# Altium PCB pcb_proc.PcbDoc
Units mm, origin at the board's own origin, x right, y up, seen from the top; angles counter-clockwise.
Board outline 100.33 x 94.04 mm, 2 copper layers (Top Layer, Bottom Layer), stack 1.671 mm thick; 67 components, 51 nets, 264 pads, 89 vias.
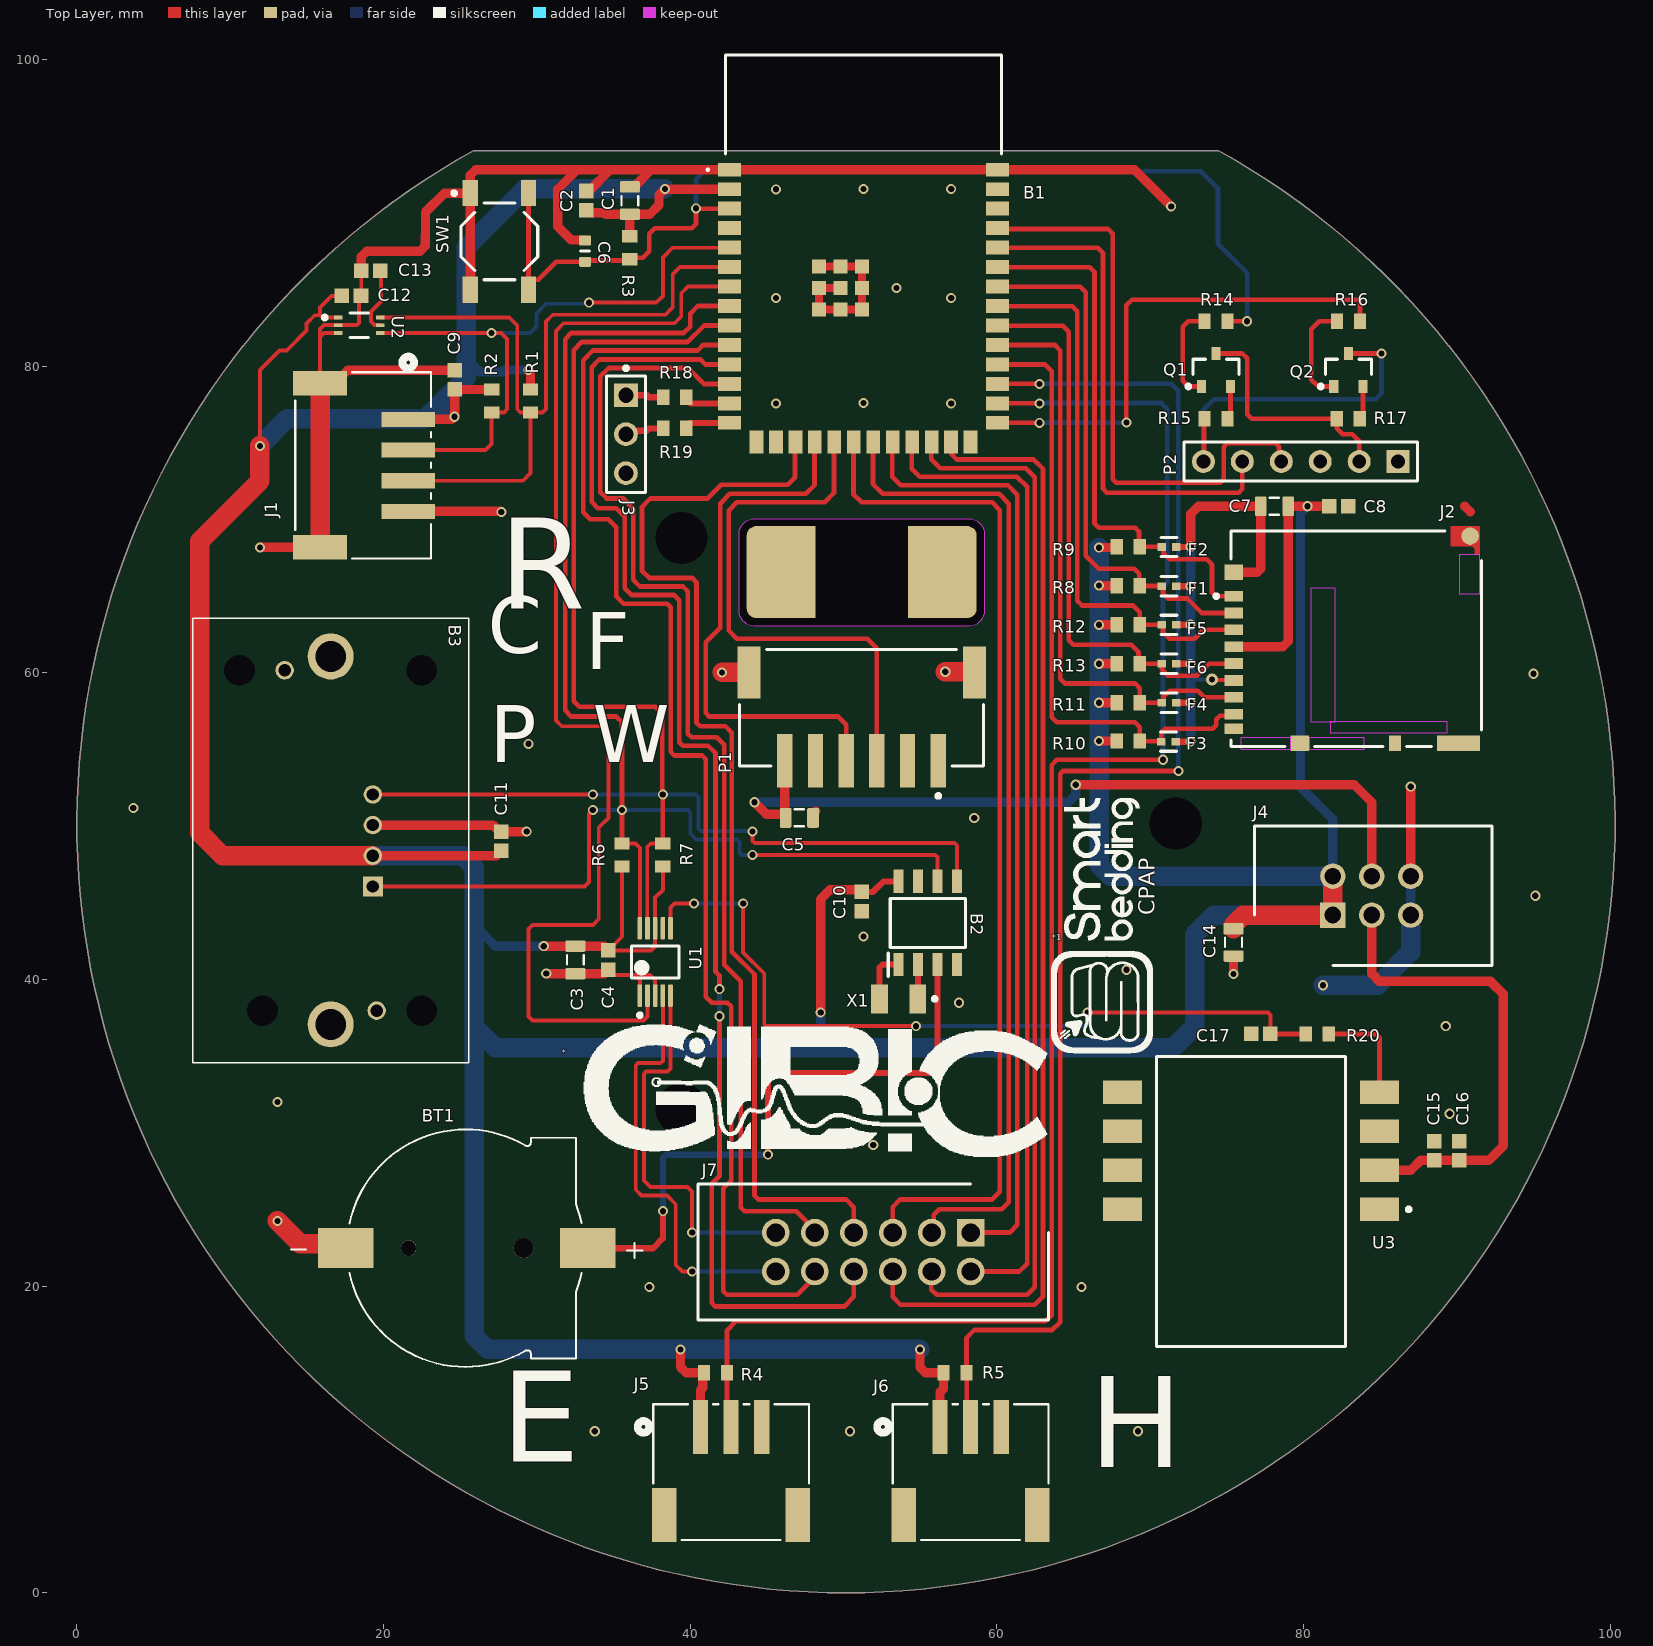
[diagram p0: Top Layer view]
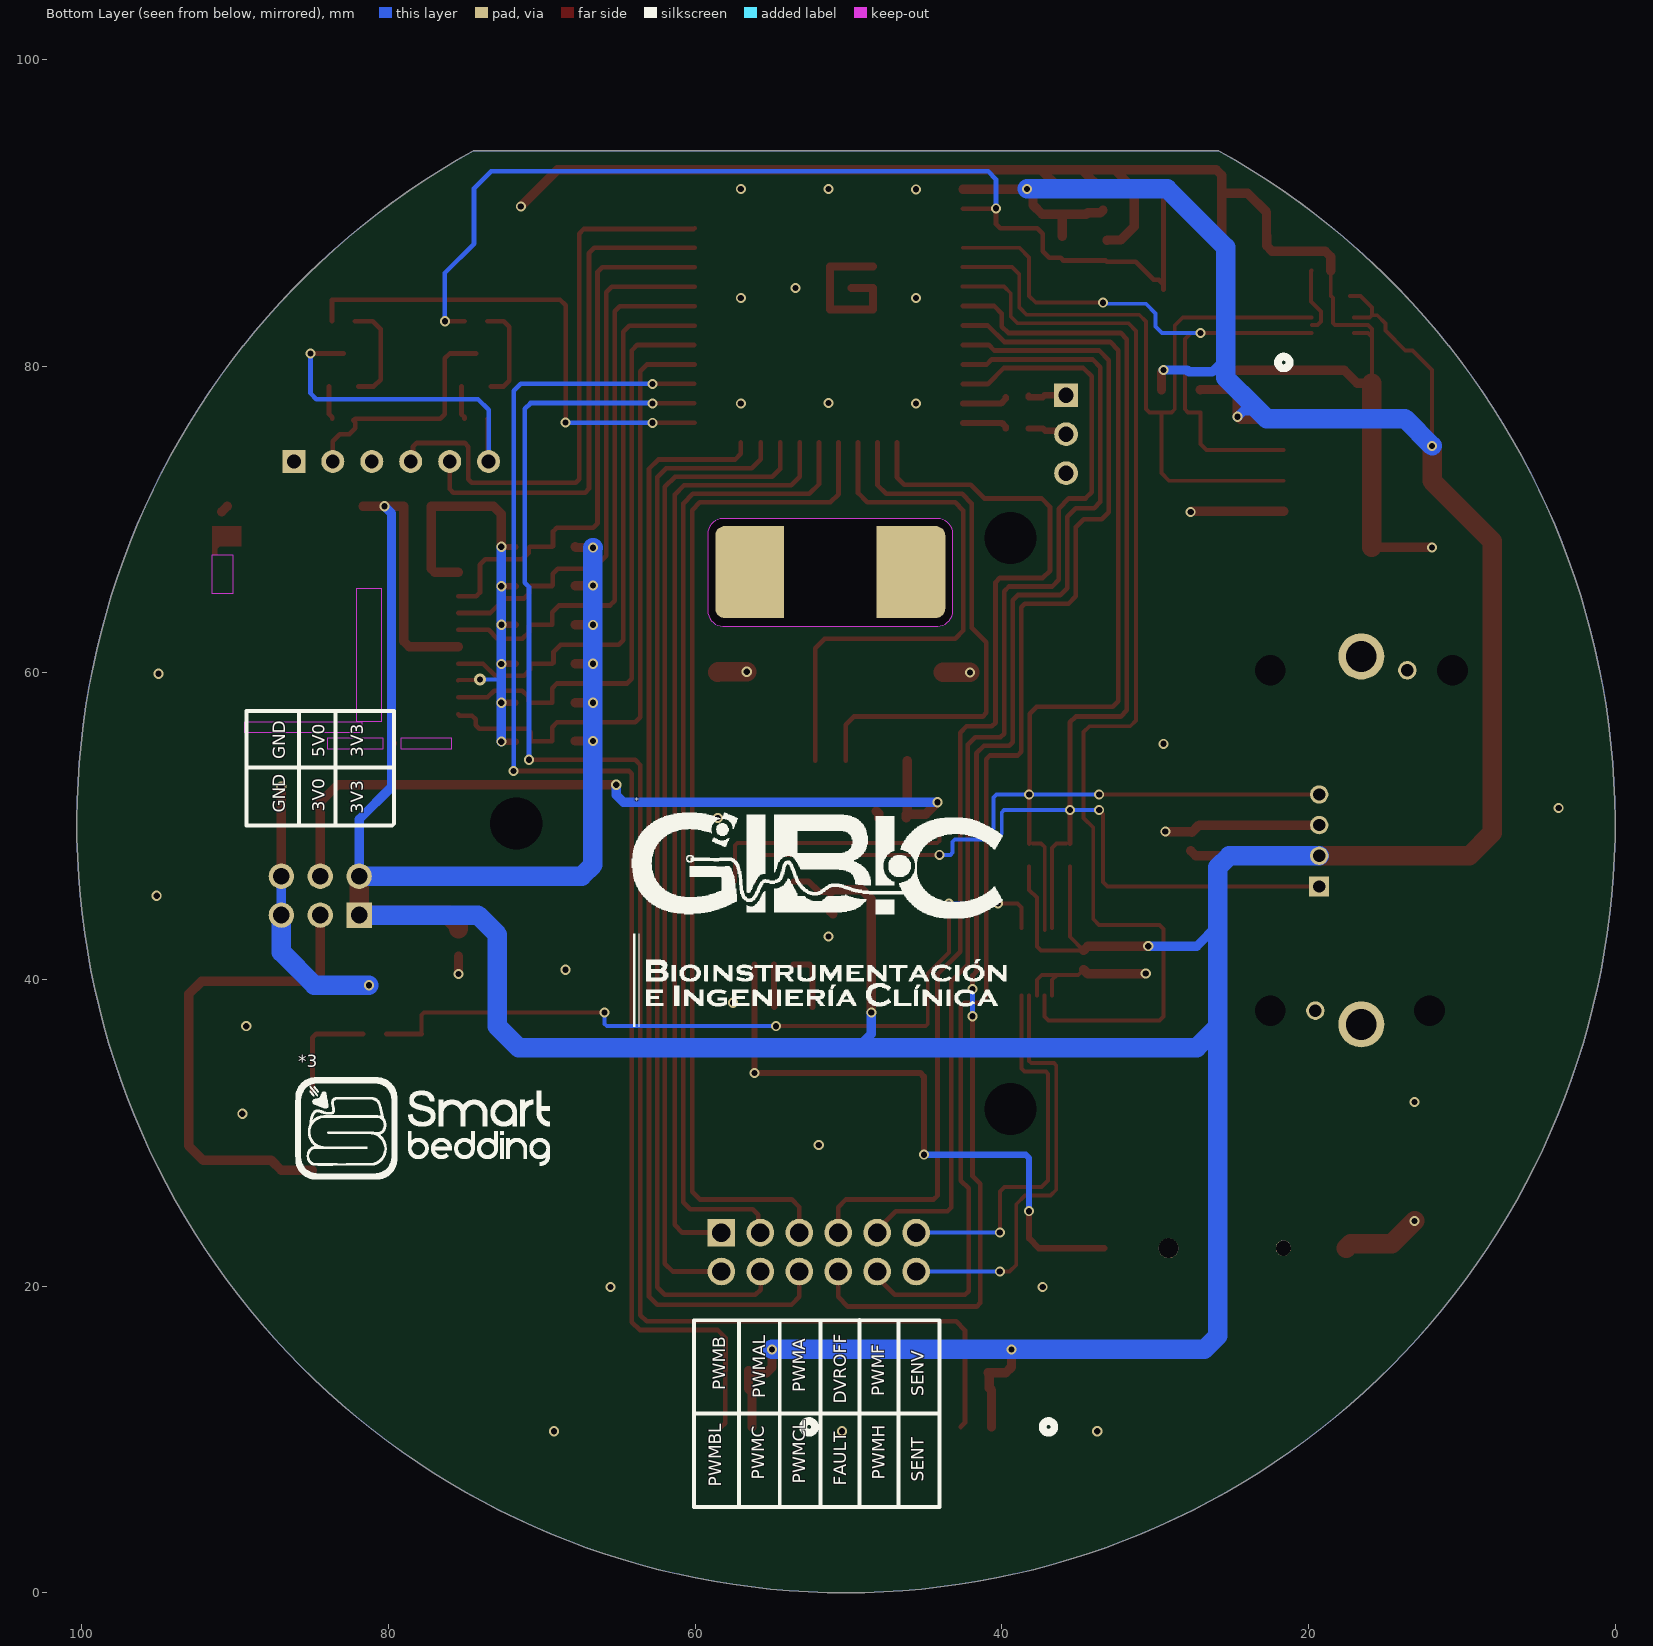
[diagram p1: Bottom Layer view, seen from below]

## Layer stack, top to bottom
Top Solder: solder mask 0.0102, Solder Resist, Dk 3.5
Top Layer: signal copper 0.0356
Dielectric 1: dielectric 1.6, FR-4, Dk 4.8
Bottom Layer: signal copper 0.0356
Bottom Solder: solder mask 0.0102, Solder Resist, Dk 3.5

## Board outline
25.845,94.04 ccw(c50.165,50.165) 74.485,94.04
cut-out: 43.191,64.052 43.191,69.052 cw(c44.191,69.052) 44.191,70.052 58.191,70.052 cw(c58.191,69.052) 59.191,69.052 59.191,64.052 cw(c58.191,64.052) 58.191,63.052 44.191,63.052 cw(c44.191,64.052)

## Design rules (kind name [scope] priority, off if disabled: settings)
BoardOutlineClearance [All] p1: gap=0.508 ignorepadtopadclearanceinfootprint=FALSE
Clearance Clearance_1 [All] p1: gap=0.152 ignorepadtopadclearanceinfootprint=FALSE except(0: Arc-Hole Track-Hole SMDPad-Hole THPad-Hole Via-Hole Fill-Hole Poly-Hole Region-Hole Text-Hole; 0.508: Arc-Poly Track-Poly SMDPad-Poly THPad-Poly Via-Poly Fill-Poly Poly-Poly Poly-Region Poly-Text)
Clearance [InNet('GND')] p2: gap=0.152 ignorepadtopadclearanceinfootprint=FALSE except(0: Arc-Hole Track-Hole SMDPad-Hole THPad-Hole Via-Hole Fill-Hole Poly-Hole Region-Hole Text-Hole; 0.508: Arc-Poly Arc-Region Track-Poly Track-Region SMDPad-Poly SMDPad-Region THPad-Poly THPad-Region Via-Poly Via-Region Fill-Poly Fill-Region Poly-Poly Poly-Region Poly-Text Region-Region)
MinimumSolderMaskSliver [All] p1: minsoldermaskwidth=0.102
PolygonConnect [All] p1: connectstyle=Relief reliefconductorwidth=0.508 reliefentries=4 polygonreliefangle="90 Angle" airgapwidth=0.254
RoutingVias [All] p1: holewidth=0.711 width=1.422 viastyle="Through Hole" minholewidth=0.254 minwidth=0.508 maxholewidth=0.406 maxwidth=0.762
SilkToSilkClearance [All] p1: silktosilkclearance=0.102
SilkToSolderMaskClearance [IsPad] p1: minsilkscreentomaskgap=0.152 clearancetoexposedcopper=TRUE
SolderMaskExpansion [All] p1: expansion=0.102 istentingtop=FALSE
Width [All] p1: maxlimit=2.54 minlimit=0.254 preferedwidth=0.406
27 further rules are at their usual default settings.

## Classes and differential pairs
net class PWR: 3V 3V3 5V GND
component class Sen_PF: C12 C13 C14 C15 C16 C17 J4 J5 J6 J7 P4 R20 U2 U3
component class Processor: B1 B2 B3 BT1 C1 C2 C3 C4 C5 C6 C7 C8 C9 C10 C11 F1 F2 F3 F4 F5 F6 J1 J2 J3 P1 P2 Q1 Q2 R1 R2 R3 R4 R5 R6 R7 R8 R9 R10 R11 R12 R13 R14 R15 R16 R17 R18 R19 SW1 U1 X1

## Components (designator, comment, footprint, x,y, rotation, side; value= is the part's Value field where it differs from the comment)
* "GIBIC_Silk" GIBIC_SILK 48.133,32.893 r0 top
* "GIBIC_ALLSilk" GIBIC_ALL_SILK 52.181,44.958 r180 bottom
*1 "SB2_Silk" SMARTBEDDING2_SILK 66.929,43.561 r90 top
*3 "SB2_Silk" SMARTBEDDING2_SILK 77.724,30.226 r180 bottom
B1 "ESP32-S3-WROOM-1-N8R8" ESP32S3WROOM1N8R8 51.308,87.557 r0 top
B2 "DS1338Z-33+" SOIC127P600X175-8N 55.499,43.688 r90 top
B3 "SDP810-125Pa" SDP810125PA 19.304,46.07 r90 top locked
BT1 "1056" BAT_1056 25.146,22.479 r180 top
C1 "Capacitor 22µF +/-40% 16V 0805" CAPC0805(2012)145_L 36.068,90.805 r90 top
C2 "Capacitor 100 nF +/-10% 50 V 0603" CAPC1608X90X40NL10T20 33.234,90.805 r90 top
C3 "Capacitor 22µF +/-40% 16V 0805" CAPC0805(2012)145_L 32.512,41.275 r270 top
C4 "Capacitor 100 nF +/-10% 50 V 0603" CAPC1608X90X40NL10T20 34.671,41.275 r270 top
C5 "Capacitor 22µF +/-40% 16V 0805" CAPC0805(2012)145_L 47.117,50.546 r180 top
C6 "Capacitor 1µF +/-40% 50V 0603" CAPC0603(1608)100_L 33.147,87.503 r270 top
C7 "Capacitor 22µF +/-40% 16V 0805" CAPC0805(2012)145_L 78.106,70.866 r180 top
C8 "Capacitor 100 nF +/-10% 50 V 0603" CAPC1608X90X40NL10T20 82.296,70.866 r0 top
C9 "Capacitor 100 nF +/-10% 50 V 0603" CAPC1608X90X40NL10T20 24.638,79.111 r90 top
C10 "Capacitor 100 nF +/-10% 50 V 0603" CAPC1608X90X40NL10T20 51.181,45.085 r270 top
C11 "Capacitor 100 nF +/-10% 50 V 0603" CAPC1608X90X40NL10T20 27.686,49.022 r90 top
C12 "Capacitor 100 nF +/-10% 50 V 0603" CAPC1608X90X40NL10T20 17.907,84.582 r0 top
C13 "Capacitor 100 nF +/-10% 50 V 0603" CAPC1608X90X40NL10T20 19.177,86.233 r180 top
C14 "Capacitor 22µF +/-40% 16V 0805" CAPC0805(2012)145_L 75.438,42.418 r270 top
C15 "Capacitor 100 nF +/-10% 50 V 0603" CAPC1608X90X40NL10T20 88.519,28.829 r90 top
C16 "Capacitor 100 nF +/-10% 50 V 0603" CAPC1608X90X40NL10T20 90.17,28.829 r90 top
C17 "Capacitor 100 nF +/-10% 50 V 0603" CAPC1608X90X40NL10T20 77.216,36.449 r180 top
F1 "LESD8D3.3CAT5G" FP-ESDALC5-1BM2-MFG 71.227,65.649 r180 top
F2 "LESD8D3.3CAT5G" FP-ESDALC5-1BM2-MFG 71.227,68.212 r180 top
F3 "LESD8D3.3CAT5G" FP-ESDALC5-1BM2-MFG 71.207,55.512 r180 top
F4 "LESD8D3.3CAT5G" FP-ESDALC5-1BM2-MFG 71.227,58.052 r180 top
F5 "LESD8D3.3CAT5G" FP-ESDALC5-1BM2-MFG 71.227,63.132 r180 top
F6 "LESD8D3.3CAT5G" FP-ESDALC5-1BM2-MFG 71.227,60.592 r180 top
J1 "S4B-PH-SM4-TBLFSN" CONN_S4B-PH-SM4-TBLFSN_JST 18.669,73.533 r90 top
J2 "DM3AT-SF-PEJM5" FP-DM3AT-SF-PEJM5-MFG 83.439,62.23 r90 top locked
J3 "90120-0123" FP-90120-0123-MFG 35.814,75.565 r270 top
J4 "61200621621" SHDR6W64P254_2X3_1528X910X910P 81.915,44.196 r0 top
J5 "S3B-PH-SM4-TBLFSN" CONN_S3B-PH-SM4-TBLFSN_JST 42.672,7.874 r180 top
J6 "S3B-PH-SM4-TBLFSN" CONN_S3B-PH-SM4-TBLFSN_JST 58.293,7.874 r180 top
J7 "70246-1201" SHDR12W99P254_2X6_2286X889X927P 58.293,23.495 r180 top
P1 "S6B-PH-SM4-TB(LF)(SN)" JST-S6B-PH-SM4-TB(LF)(SN)_V 51.181,57.15 r180 top
P2 "Header 6" HDR1X6 86.174,73.787 r180 top
Q1 "QNPN" SOT-23B_L 74.295,79.756 r90 top
Q2 "QNPN" SOT-23B_L 82.931,79.756 r90 top
R1 "Resistor 10k +/-1% 0603 100 mW" RESC1608X55X25ML10T15 29.591,77.724 r270 top
R2 "Resistor 10k +/-1% 0603 100 mW" RESC1608X55X25ML10T15 27.051,77.724 r270 top
R3 "Resistor 10k +/-1% 0603 100 mW" RESC1608X55X25ML10T15 36.068,87.727 r270 top
R4 "Resistor 10k +/-1% 0603 100 mW" RESC1608X55X25ML10T15 41.656,14.351 r0 top
R5 "Resistor 10k +/-1% 0603 100 mW" RESC1608X55X25ML10T15 57.277,14.351 r0 top
R6 "Resistor 10k +/-1% 0603 100 mW" RESC1608X55X25ML10T15 35.56,48.117 r90 top
R7 "Resistor 10k +/-1% 0603 100 mW" RESC1608X55X25ML10T15 38.219,48.117 r90 top
R8 "Resistor 10k +/-1% 0603 100 mW" RESC1608X55X25ML10T15 68.568,65.69 r0 top
R9 "Resistor 10k +/-1% 0603 100 mW" RESC1608X55X25ML10T15 68.568,68.221 r0 top
R10 "Resistor 10k +/-1% 0603 100 mW" RESC1608X55X25ML10T15 68.568,55.558 r0 top
R11 "Resistor 10k +/-1% 0603 100 mW" RESC1608X55X25ML10T15 68.568,58.052 r0 top
R12 "Resistor 10k +/-1% 0603 100 mW" RESC1608X55X25ML10T15 68.568,63.132 r0 top
R13 "Resistor 10k +/-1% 0603 100 mW" RESC1608X55X25ML10T15 68.568,60.592 r0 top
R14 "Resistor 10k +/-1% 0603 100 mW" RESC1608X55X25ML10T15 74.295,82.931 r0 top
R15 "Resistor 10k +/-1% 0603 100 mW" RESC1608X55X25ML10T15 74.295,76.581 r0 top
R16 "Resistor 10k +/-1% 0603 100 mW" RESC1608X55X25ML10T15 82.943,82.931 r0 top
R17 "Resistor 10k +/-1% 0603 100 mW" RESC1608X55X25ML10T15 82.931,76.581 r0 top
R18 "Resistor 10k +/-1% 0603 100 mW" RESC1608X55X25ML10T15 38.989,77.978 r0 top
R19 "Resistor 10k +/-1% 0603 100 mW" RESC1608X55X25ML10T15 38.989,75.946 r0 top
R20 "Resistor 10k +/-1% 0603 100 mW" RESC1608X55X25ML10T15 80.899,36.449 r180 top
SW1 "TL3342F160QG" ESWI-TL3342F160QG_V 27.559,88.138 r0 top
U1 "ADS1015IDGST" FP-DGS0010A-MFG 37.719,41.148 r90 top
U2 "BH1750FVI-TR" ROHM_BH1750FVI-TR_0 18.415,82.677 r0 top
U3 "MP3V5004DP" Freescale_Semiconductor_SOT1693-1_MFG 76.581,28.829 r180 top locked
X1 "ABS07-32.768KHz-T" ABRA-ABS07-2_V 53.594,38.735 r180 top

## Footprints (in the part's own frame and the unit in brackets; to place one, negate y for a bottom-side part, rotate by r counter-clockwise, add the part's x,y. Pads: shape width x height; smd on the part's side, far side on the other; paste and mask are expansions set on the pad)
ABRA-ABS07-2_V [mm] "SMD, 2-Leads, Body 3.2x1.5mm"
  rect 1.1x1.9 smd: 1(-1.25,0) 2(1.25,0)
  silkscreen extent -2.48,-0.12 -2.23,0.12, body extent -1.6,-0.75 1.6,0.75, height 0.9
BAT_1056 [mm]
  rect 3.6x2.6 smd: N(7.61,0) P(-8.18,0)
  round 1.3 hole 1.3 unplated: ""(-3.98,0)
  round 1 hole 1 unplated: ""(3.51,0)
  silkscreen extent -11.74,-7.75 11.18,7.75, body extent -9.58,-7.5 9.22,7.63, height 4.17
CAPC0603(1608)100_L [mm] "Chip Capacitor, Body 1.6x0.8mm, Height 1.0mm, IPC High Density"
  rrect25% 0.66x0.76 smd: 1(-0.7,0) 2(0.7,0)
  silkscreen extent 0,-0.3 0,0.3, body extent -0.8,-0.4 0.8,0.4, height 0.95
CAPC0805(2012)145_L [mm] "Chip Capacitor, Body 2.0x1.2mm, Height 1.45mm, IPC High Density"
  rrect25% 0.76x1.3 smd: 1(-0.9,0) 2(0.89,0)
  silkscreen extent -0.3,-0.55 0.3,0.55, body extent -1,-0.6 1,0.6, height 1.45
CAPC1608X90X40NL10T20 [mm] "Chip Capacitor, 2-Leads, Body 1.70x0.90mm, IPC Medium Density"
  rect 0.95x0.95 smd: 1(-0.625,0) 2(0.625,0)
  body extent -0.85,-0.45 0.85,0.45, height 0.9
CONN_S3B-PH-SM4-TBLFSN_JST [mil]
  rect 39x138 smd paste+0 mask+0: 1(78.74,-115.93) 2(0,-115.93) 3(-78.74,-115.93)
  rect 63x138 smd paste+0 mask+0: 4(-171.26,110.44) 5(171.26,110.44)
  silkscreen extent -200,-175 240,175, body extent -195,-169 195,170, height 217
CONN_S4B-PH-SM4-TBLFSN_JST [mil]
  rect 39x138 smd paste+0 mask+0: 1(118.11,-115.93) 2(39.37,-115.93) 3(-39.37,-115.93) 4(-118.11,-115.93)
  rect 63x138 smd paste+0 mask+0: 5(-210.63,110.44) 6(210.63,110.44)
  silkscreen extent -239,-175 279,174, body extent -234,-144 234,205, height 215
ESP32S3WROOM1N8R8 [mm]
  rect 1.5x0.9 smd: 1(-8.75,5.26) 2(-8.75,3.99) 3(-8.75,2.72) 4(-8.75,1.45) 5(-8.75,0.18) 6(-8.75,-1.09) 7(-8.75,-2.36) 8(-8.75,-3.63) 9(-8.75,-4.9) 10(-8.75,-6.17) 11(-8.75,-7.44) 12(-8.75,-8.71) 13(-8.75,-9.98) 14(-8.75,-11.25) 27(8.75,-11.25) 28(8.75,-9.98) 29(8.75,-8.71) 30(8.75,-7.44) 31(8.75,-6.17) 32(8.75,-4.9) 33(8.75,-3.63) 34(8.75,-2.36) 35(8.75,-1.09) 36(8.75,0.18) 37(8.75,1.45) 38(8.75,2.72) 39(8.75,3.99) 40(8.75,5.26)
  rect 0.9x1.5 smd: 15(-6.985,-12.5) 16(-5.715,-12.5) 17(-4.445,-12.5) 18(-3.175,-12.5) 19(-1.905,-12.5) 20(-0.635,-12.5) 21(0.635,-12.5) 22(1.905,-12.5) 23(3.175,-12.5) 24(4.445,-12.5) 25(5.715,-12.5) 26(6.985,-12.5)
  rect 0.9x0.9 smd: 41(-1.5,-2.46) 42(-1.5,-1.06) 43(-2.9,-1.06) 44(-2.9,-2.46) 45(-2.9,-3.86) 46(-1.5,-3.86) 47(-0.1,-3.86) 48(-0.1,-2.46) 49(-0.1,-1.06)
  silkscreen extent -10.2,5.21 9,12.75, body extent -9,-12.75 9,12.75, height 3.1
ESWI-TL3342F160QG_V [mm] "SMD, 4-Leads, Body 5x5mm, Pitch 6.3mm"
  rect 1x1.7 smd: 1(-1.9,3.15) 2(-1.9,-3.15) 3(1.9,3.15) 4(1.9,-3.15)
  silkscreen extent -3.07,-2.5 2.5,3.27, body extent -2.5,-2.5 2.5,2.5, height 1.5
FP-90120-0123-MFG [mm]
  rect 1.55x1.55 hole 1 paste-2539.97 mask+0: 1(-2.54,0)
  round 1.55 hole 1 paste-2539.97 mask+0: 2(0,0) 3(2.54,0)
  silkscreen extent -4.42,-1.27 3.81,1.27, body extent -3.91,-1.37 3.91,1.37, height 0.25
FP-DGS0010A-MFG [mm]
  rrect33% 1.45x0.3 smd paste+0 mask+0: 1(-2.2,1) 2(-2.2,0.5) 3(-2.2,0) 4(-2.2,-0.5) 5(-2.2,-1) 6(2.2,-1) 7(2.2,-0.5) 8(2.2,0) 9(2.2,0.5) 10(2.2,1)
  silkscreen extent -3.6,-1.55 1.05,1.55, body extent -3.03,-1.8 3.03,1.8, height 0.25
FP-DM3AT-SF-PEJM5-MFG [mm]
  rect 0.7x1.2 smd paste+0 mask+0: 1(2.775,7.975) 2(1.675,7.975) 3(0.575,7.975) 4(-0.525,7.975) 5(-1.625,7.975) 6(-2.725,7.975) 7(-3.825,7.975) 8(-4.925,7.975) 9(-5.875,7.975)
  rect 1x0.8 smd paste+0 mask+0: 10(-6.825,-2.525)
  rect 1x1.2 smd paste+0 mask+0: 11(4.325,7.975) 12(-6.825,3.675)
  rect 1x2.8 smd paste+0 mask+0: 13(-6.825,-6.675)
  round 1.145 smd paste+0 mask+0: 14(6.689,-7.439)
  Top Layer region: 6.025,-6.175 7.325,-6.175 7.325,-8.075 5.475,-8.075 5.475,-7.725 5.875,-7.725 6.025,-7.575
  Keep-Out Layer region: 2.925,-8.075 5.475,-8.075 5.475,-6.725 2.925,-6.725
  Keep-Out Layer region: -7.225,-0.525 -6.475,-0.525 -6.475,3.075 -7.225,3.075
  Keep-Out Layer region: -7.225,4.275 -6.475,4.275 -6.475,7.525 -7.225,7.525
  Keep-Out Layer region: -6.125,-5.925 -5.425,-5.925 -5.425,1.675 -6.125,1.675
  Keep-Out Layer region: -5.425,1.375 3.275,1.375 3.275,2.975 -5.425,2.975
  silkscreen extent -7.02,-8.18 7.02,9.25, body extent -7.42,-8.27 7.42,8.67, height 0.25
FP-ESDALC5-1BM2-MFG [mm]
  rect 0.55x0.5 smd paste+0 mask+0: 1(-0.475,0) 2(0.475,0)
  silkscreen extent -0.53,-0.63 0.53,0.63, body extent -0.85,-0.43 0.85,0.43, height 0.25
Freescale_Semiconductor_SOT1693-1_MFG [mil]
  rect 100x60 smd paste+0 mask+0: 1(-330,150) 2(-330,50) 3(-330,-50) 4(-330,-150) 5(330,-150) 6(330,-50) 7(330,50) 8(330,150)
  silkscreen extent -410,-243 243,503, body extent -384,-252 384,506, height 10
GIBIC_ALL_SILK [mm]
  silkscreen extent -11.94,-8.05 12.48,5.89
GIBIC_SILK [mm]
  silkscreen extent -15.06,-4.42 15.16,4.17
HDR1X6 [mm] "Connector; Header; 6 Position"
  rect 1.5x1.5 hole 0.9: 1(0,0)
  round 1.5 hole 0.9: 2(2.54,0) 3(5.08,0) 4(7.62,0) 5(10.16,0) 6(12.7,0)
  silkscreen extent -1.27,-1.27 13.97,1.27
JST-S6B-PH-SM4-TB(LF)(SN)_V [mm] "SMD, 2-Leads, Body 15.9x7.6mm, Pitch 2mm"
  rect 1x3.5 smd: 1(-5,2.875) 2(-3,2.875) 3(-1,2.875) 4(1,2.875) 5(3,2.875) 6(5,2.875)
  rect 1.5x3.4 smd: MP1(-7.35,-2.875) MP2(7.35,-2.875)
  silkscreen extent -7.95,-4.37 7.95,5.3, body extent -7.95,-4.37 7.95,4.23, height 5.6
RESC1608X55X25ML10T15 [mm] "Chip Resistor, 2-Leads, Body 1.70x0.90mm, IPC Low Density"
  rect 0.8x1 smd: 1(-0.75,0) 2(0.75,0)
  body extent -0.85,-0.45 0.85,0.45, height 0.55
ROHM_BH1750FVI-TR_0 [mm]
  rect 0.55x0.25 smd paste+0 mask+0: 1(-1.375,0.5) 2(-1.375,0) 3(-1.375,-0.5) 4(1.375,-0.5) 5(1.375,0) 6(1.375,0.5)
  silkscreen extent -2.37,-0.8 0.6,0.8, body extent -1.75,-1 1.75,1, height 0.25
SDP810125PA [mm]
  rect 1.3x1.3 hole 0.8: 1(0,0)
  round 1.2 hole 0.8: 2(2,0) 3(4,0) 4(6,0) 5(14.1,5.75) 6(-8.1,-0.25)
  round 1 hole 2 unplated: MH1(-8.1,-3.2) MH2(14.1,-3.2) MH3(14.1,8.7) MH4(-8.1,7.2)
  round 3 hole 2: MS1(15,2.75) MS2(-9,2.75)
  silkscreen extent -11.5,-6.25 17.5,11.75, body extent -12.55,-7.3 18.55,12.8, height 23.79
SHDR6W64P254_2X3_1528X910X910P [mm]
  rect 1.65x1.65 / inner round 1.65 / far side rect 1.65x1.65 hole 1.1: 1(0,0)
  round 1.65 hole 1.1: 2(0,2.54) 3(2.54,0) 4(2.54,2.54) 5(5.08,0) 6(5.08,2.54)
  silkscreen extent -5.1,-3.28 10.38,5.82, body extent -5.1,-3.03 10.18,6.07, height 9.1
SHDR12W99P254_2X6_2286X889X927P [mm]
  rect 1.8x1.8 / inner round 1.8 / far side rect 1.8x1.8 hole 1.2: 1(0,0)
  round 1.8 hole 1.2: 2(0,2.54) 3(2.54,0) 4(2.54,2.54) 5(5.08,0) 6(5.08,2.54) 7(7.62,0) 8(7.62,2.54) 9(10.16,0) 10(10.16,2.54) 11(12.7,0) 12(12.7,2.54)
  silkscreen extent -5.08,-3.17 17.78,5.72, body extent -4.95,-2.92 17.91,5.97, height 9.28
SMARTBEDDING2_SILK [mm]
  silkscreen extent -8.35,-3.26 8.25,3.36
SOIC127P600X175-8N [mm]
  rect 1.525x0.65 smd: 1(-2.712,1.905) 2(-2.712,0.635) 3(-2.712,-0.635) 4(-2.712,-1.905) 5(2.712,-1.905) 6(2.712,-0.635) 7(2.712,0.635) 8(2.712,1.905)
  silkscreen extent -3.47,-2.45 1.6,2.58, body extent -3,-2.41 3,2.49, height 1.75
SOT-23B_L [mm] "SOT23, 3-Leads, Body 2.9x1.3mm, Pitch 0.95mm, Lead Span 2.4mm, IPC High Density"
  rect 0.85x0.6 smd: 1(-1.075,0.95) 2(-1.075,-0.95) 3(1.075,0)
  silkscreen extent -1.2,-1.5 0.7,1.92, body extent -0.7,-1.5 0.7,1.5, height 1.14

## Part data
B1: "WiFi Modules - 802.11 (Engineering Samples Only) SMD Module, ESP32-S3R8 with 8 MB Octal PSRAM Die, 8 MB Quad SPI flash, PCB Antenna"
B2: "Real Time Clock Serial 56Byte Maxim DS1338Z-33+ Real Time Clock  Battery Backup, Calendar, Clock, NV Timekeeping RAM, 56B RAM 8-Pin SOIC"
B3: "Sensirion SDP810-125PA, Differential Pressure Sensor +125Pa 4-Pin"
C1 C3 C5 C7 C14: library part CMP-001-00081-4, "Chip Capacitor, 22µF +/-40%, 16V, 0805, Thickness 1.45 mm"
C2 C4 C8 C9 C10 C11 C12 C13 C15 C16 C17: library part CMP-001-00017-6, "Chip Capacitor, 100 nF, +/- 10%, 50 V, 0603 (1608 Metric)"
C6: library part CMP-001-00078-4, "Chip Capacitor, 1µF +/-40%, 50V, 0603, Thickness 1 mm"
F1 F2 F3 F4 F5 F6: library part CMP-00355-46355615-1, "ESDALC5-1BM2 ESD Suppressors / TVS Diodes Single Line Transil Vbr 5V min 26pF 0"
J1 J5 J6: "No Description Available"
J2: library part CMP-2000-05150-2, "CONN MICRO SD CARD PUSH-PUSH R/A"
J3: library part CMP-04776-000237-1, "CONN HEADER VERT 3POS 2.54MM"
J4: "Wurth Elektronik PCB Header WR-BHD, 6 Way, 2.54mm Pitch, 2 Row, Straight, Through Hole"
J7: "MOLEX - 70246-1201 - Wire-To-Board Connector, 2.54 mm, 12 Contacts, Header, C-Grid 70246 Series, Through Hole, 2 Rows"
P1: library part CMP-2000-07027-1, "Male Header, Pitch 2 mm, 1 x 6 Position, Height 5.5 mm, -25 to 85 degC"
P2: "Header, 6-Pin"
Q1 Q2: "NPN Bipolar Transistor"
R1 R2 R3 R4 R5 R6 R7 R8 R9 R10 R11 R12 R13 R14 R15 R16 R17 R18 R19 R20: library part CMP-009-00017-5, "Chip Resistor, 10 KOhm, +/- 1%, 01 W, -55 to 155 degC, 0603 (1608 Metric)"
SW1: library part CMP-011-00008-2, "Tactile Switch, SPST-NO, 50 mA, 12 V, 4-Pin SMD, RoHS, Tape and Reel"
U1: library part CMP-0003-00377-3, "IC ADC 12BIT SIGMA-DELTA 10VSSOP"
U2: "BH1730FVI-TR"
U3: library part CMP-005-000000-1, "Pressure Sensor 0.57PSI (3.92kPa) Differential Male - 0.13\" (3.3mm) Tube, Dual 0.6 V ~ 3 V 8-BSOP (0.475\", 12.06mm Width) Dual Ports, Same Side"
X1: library part CMP-003-00022-2, "Low Profile Crystal, 32.768 kHz, +/- 20 ppm, 12.5 pF, -40 to 85 degC, 2-Pin SMD, Pb-Free, Tape and Reel"

## Free pads (board coordinates)
  round 1.524 hole 3.4: 0(39.425,31.551) 0(39.425,68.79) 0(71.675,50.171)
  rrect20% 15x6 hole 6 square: 0(51.191,66.575)

## Via types
v1: diameter 0.66, hole 0.406, Top Layer to Bottom Layer, tented both sides, 88 vias
v2: diameter 0.762, hole 0.406, Top Layer to Bottom Layer, tented both sides, 1 vias

## Nets (pads, with @x,y where several pads share a name; then routed paths per layer and width w, separated by ;. In a path a pad name is that pad's centre, name@x,y a point inside that pad or via, vN(x,y) a via of type N, cw(c..) or ccw(c..) an arc to the next point about the centre after c; other vN are vias at no path point)
3V: C15.1 C16.1 J4.3 U3.2 | length 31.6
  Top Layer w0.61: J4.3 84.455,40.386 84.963,39.878 92.202,39.878 93.027,39.052 93.027,29.146 92.085,28.204 C16.1 C15.1 87.64,28.204 86.995,27.559 U3.2
3V3: B1.2 B2.8 B3.2 C1.1 C2.1 C3.1 C4.1 C7.1 C8.1 C9.1 C10.1 C11.1 C12.1 C14.1 J1.1 J2.4 J4.1 J4.2 J5.1 J6.1 R1.1 R2.1 R3.1 R4.1 R5.1 R6.1 R7.1 R8.1 R9.1 R10.1 R11.1 R12.1 R13.1 U1.8 U2.1 | length 402.2
  Top Layer w0.254: v1(11.938,74.803) 11.938,79.756 13.208,81.026 13.691,81.026 14.986,82.321 14.986,82.794 15.518,83.326 15.864,83.326 ; U2.1 16.012,83.177 15.864,83.326 ; C12.1 16.621,84.582 15.864,83.825 15.864,83.326 ; R6.1 35.56,42.789 C4.1 37.455,41.9 37.719,42.164 U1.8 37.719,45.339 38.219,45.839 R7.1
  Top Layer w0.406: C10.1 51.926,45.71 52.616,46.4 B2.8
  Top Layer w0.61: B3.2 27.359,48.07 C11.1 ; J1.1 24.449,76.533 24.624,76.708 v1(24.638,76.708) C9.1 24.644,78.48 27.045,78.48 R2.1 ; v1(29.464,79.756) 29.464,79.742 29.591,79.615 R1.1 ; v1(30.455,42.175) C3.1 34.396,42.175 C4.1 ; C2.1@33.401,90.18 33.571,90.01 34.399,90.01 34.504,89.905 C1.1 ; R3.1 C1.1 ; v1(39.37,15.875) 39.37,14.732 39.751,14.351 R4.1 40.811,14.256 40.811,13.359 40.672,13.22 J5.1 ; B1.2@42.537,91.537 38.398,91.537 38.368,91.567 v1(38.354,91.567) 38.354,91.566 37.973,91.185 37.973,90.519 37.359,89.905 C1.1 ; v1(48.514,37.846) 48.515,37.847 48.515,45.244 49.125,45.854 51.037,45.854 C10.1 ; v1(54.991,15.875) 54.991,14.708 55.348,14.351 R5.1 ; J6.1 56.293,13.081 56.527,13.315 R5.1 ; R5.1@56.527,14.478 R5.1 ; v1(66.659,68.165) 66.669,68.175 67.771,68.175 R9.1 ; v1(66.669,55.558) R10.1 ; v1(66.669,58.052) R11.1 ; v1(66.669,60.592) R13.1 ; v1(66.669,63.132) R12.1 ; v1(66.669,65.69) R8.1 ; J2.4 78.649,61.705 79.006,62.062 C7.1 v1(80.264,70.866) C8.1
  Top Layer w1.27: v1(11.938,74.803) 11.938,72.517 8.001,68.58 8.001,49.576 9.507,48.07 B3.2 ; C14.1 75.438,43.558 76.079,44.199 81.912,44.199 J4.1 J4.2
  Bottom Layer w0.61: 23.495,77.343 23.732,77.106 24.226,77.106 24.624,76.708 v1(24.638,76.708) ; 25.527,80.391 26.273,79.645 27.806,79.645 27.917,79.756 v1(29.464,79.756) ; 25.908,42.133 25.95,42.175 ; 25.908,43.561 27.294,42.175 v1(30.455,42.175) ; v1(48.514,37.846) 48.514,36.449 49.403,35.56 ; v1(80.264,70.866) 79.805,70.407 79.805,52.557 81.915,50.447 J4.2
  Bottom Layer w1.27: v1(11.938,74.803) 13.716,76.581 22.733,76.581 23.495,77.343 25.4,79.248 25.4,87.757 29.21,91.567 v1(38.354,91.567) ; B3.2 25.164,48.07 25.908,47.326 25.908,43.561 25.908,42.133 25.908,36.939 ; v1(54.991,15.875) v1(39.37,15.875) 26.797,15.875 25.908,16.764 25.908,36.939 ; v1(66.659,68.165) 66.669,68.155 v1(66.669,65.69) v1(66.669,63.132) v1(66.669,60.592) v1(66.669,58.052) v1(66.669,55.558) 66.669,47.48 67.413,46.736 J4.2 ; J4.1 74.168,44.196 72.898,42.926 72.898,36.939 71.519,35.56 49.403,35.56 27.287,35.56 25.908,36.939
5V: C5.2 J4.4 P1.6 | length 52.5
  Top Layer w0.61: v1(44.196,51.562) 44.968,50.79 C5.2@46.201,50.79 ; P1.6 46.181,50.809 C5.2@46.201,50.79 ; C5.2 46.227,50.763 C5.2@46.201,50.79 ; v1(65.151,52.705) 83.312,52.705 84.455,51.562 J4.4
  Bottom Layer w0.61: v1(44.196,51.562) 64.675,51.562 65.151,52.038 v1(65.151,52.705)
A1: C17.1 R20.2 U1.6 | length 52.1
  Top Layer w0.254: U1.6 38.719,44.688 38.989,44.958 v1(40.259,44.958) ; v1(43.459,44.958) 43.459,41.752 44.831,40.38 44.831,37.106 44.98,36.957 v1(54.737,36.957) ; v1(65.913,37.846) 77.692,37.846 77.841,37.697 C17.1
  Top Layer w0.305: C17.1 R20.2
  Bottom Layer w0.254: v1(40.259,44.958) v1(43.459,44.958) ; v1(54.737,36.957) 65.764,36.957 65.913,37.106 v1(65.913,37.846)
CLK: B1.32 F6.2 J2.5 R13.2 | length 37.6
  Top Layer w0.305: B1.32@60.037,82.647 64.292,82.647 64.694,82.245 64.694,62.128 64.999,61.824 68.784,61.824 69.237,61.37 69.237,60.673 R13.2 F6.2 70.777,60.567 70.777,60.198 71.158,59.817 73.053,59.817 73.841,60.605 J2.5
CMD: B1.33 F5.2 J2.3 R12.2 | length 36.4
  Top Layer w0.305: B1.33@60.037,83.917 64.927,83.917 65.253,83.591 65.253,64.701 65.557,64.396 68.879,64.396 69.318,63.956 R12.2 70.777,63.132 70.84,63.068 70.84,62.658 71.269,62.23 72.898,62.23 73.473,62.805 J2.3
CTS: P2.2 Q1.3 R17.1 | length 15.6
  Top Layer w0.305: Q1.3 76.014,80.831 76.327,80.518 76.327,76.881 76.627,76.581 R17.1 82.296,76.466 82.169,76.339 82.169,75.946 82.55,75.565 83.185,75.565 83.634,75.116 P2.2
D+: B1.14 R19.2 | length 3
  Top Layer w0.254: B1.14@42.534,76.3 B1.14@42.537,76.297
  Top Layer w0.406: R19.2 39.739,76.046 39.99,76.297 B1.14@42.537,76.297
D-: B1.13 R18.2 | length 3
  Top Layer w0.254: B1.13@42.534,77.57 B1.13@42.537,77.567
  Top Layer w0.406: R18.2 39.739,77.878 40.05,77.567 B1.13@42.537,77.567
DRVOFF: B1.17 J7.7 | length 72.1
  Top Layer w0.305: B1.17@46.842,75.047 46.842,72.75 46.355,72.263 42.037,72.263 41.148,71.374 37.414,71.374 36.855,70.816 36.855,66.659 37.322,66.192 40.13,66.192 40.411,65.911 40.411,56.753 40.649,56.515 42.307,56.515 42.723,56.099 42.723,41.806 44.196,40.333 44.196,25.892 44.434,25.654 50.165,25.654 50.673,25.146 J7.7
DT0: B1.31 F4.2 J2.7 R11.2 | length 38.8
  Top Layer w0.305: B1.31 63.774,81.387 64.135,81.026 64.135,59.614 64.44,59.309 69.012,59.309 69.318,59.003 R11.2 F4.2@70.709,58.052 ; F4.2 70.777,58.052 70.874,58.149 70.874,58.437 71.276,58.839 73.114,58.839 73.548,58.405 J2.7
DT1: B1.30 F3.2 J2.8 R10.2 | length 40.7
  Top Layer w0.305: B1.30@60.037,80.107 63.149,80.107 63.576,79.68 63.576,57.095 63.902,56.769 69.012,56.769 69.318,56.463 R10.2 69.341,55.535 70.709,55.535 F3.2 70.732,56.117 70.97,56.355 74.083,56.355 74.321,56.593 74.321,56.973 74.559,57.211 75.37,57.211 J2.8
DT2: B1.35 F2.2 J2.1 R9.2 | length 35.7
  Top Layer w0.305: B1.35@60.037,86.457 66.07,86.457 66.37,86.157 66.37,69.748 66.659,69.459 69.035,69.459 69.273,69.221 69.273,68.266 R9.2 69.323,68.217 70.747,68.217 F2.2 70.777,68.212 70.874,68.114 70.874,67.81 71.272,67.412 73.685,67.412 74.041,67.056 74.041,65.243 74.279,65.005 J2.1
DT3: B1.34 F1.2 J2.2 R8.2 | length 35
  Top Layer w0.305: B1.34@60.037,85.187 65.435,85.187 65.811,84.811 65.811,67.652 66.664,66.799 68.964,66.799 69.295,66.468 69.295,65.713 69.338,65.669 70.731,65.669 70.842,65.558 70.842,65.177 71.171,64.849 72.438,64.849 73.382,63.905 J2.2
DTR: P2.6 Q2.3 R15.1 | length 23.1
  Top Layer w0.305: P2.6@73.406,73.787 P2.6@73.412,73.793 ; P2.6 73.509,73.822 73.509,76.545 R15.1 ; Q2.3 v1(85.09,80.831)
  Bottom Layer w0.305: P2.6 73.406,73.855 73.474,73.923 73.474,77.157 74.168,77.851 84.709,77.851 85.09,78.232 v1(85.09,80.831)
ENA: B1.3 C6.2 R3.2 R14.2 SW1.3 SW1.4 | length 70.1
  Top Layer w0.305: SW1.4 SW1.4@29.459,85.338 ; SW1.3 SW1.4@29.459,85.338 ; v1(40.386,90.297) v1@40.386,90.267 ; B1.3@42.537,90.267 v1@40.386,90.267 ; R14.2 v1(76.327,82.931) ; SW1.4@29.459,85.338 29.756,85.635 30.106,85.635 31.274,86.803 C6.2 33.234,86.89 35.981,86.89 R3.2 36.171,87.08 36.915,87.08 37.338,87.503 37.338,88.646 37.699,89.007 40.112,89.007 40.386,89.281 v1@40.386,90.267
  Bottom Layer w0.305: v1(40.386,90.297) 40.386,92.202 40.894,92.71 73.316,92.71 74.422,91.604 74.422,87.983 76.327,86.078 v1(76.327,82.931)
FAULT: B1.11 J7.8 | length 88.6
  Top Layer w0.305: v1(41.91,37.6) 41.91,27.178 41.402,26.67 41.402,18.907 41.64,18.669 50.038,18.669 50.673,19.304 J7.8 ; v1(41.91,39.37) 41.91,40.259 41.656,40.513 41.656,54.753 41.164,55.245 39.532,55.245 39.294,55.483 39.294,64.735 38.954,65.075 36.181,65.075 35.738,65.518 35.738,70.168 35.167,70.739 33.986,70.739 33.579,71.146 33.579,79.934 34.087,80.442 40.668,80.442 41.003,80.107 B1.11@42.537,80.107
  Bottom Layer w0.305: v1(41.91,37.6) v1(41.91,39.37)
GND: B1.1 B1.40 B1.41 B1.42 B1.43 B1.44 B1.45 B1.46 B1.47 B1.48 B1.49 B2.4 B3.3 BT1.N C1.2 C2.2 C3.2 C4.2 C5.1 C6.1 C7.2 C8.2 C9.2 C10.2 C11.2 C12.2 C13.2 C14.2 C15.2 C16.2 C17.2 F1.1 F2.1 F3.1 F4.1 F5.1 F6.1 J1.4 J1.5 J1.6 J2.6 J2.11 J2.12 J2.13 J2.14 J3.3 J4.5 J4.6 J5.3 J5.4 J5.5 J6.3 J6.4 J6.5 P1.5 P1.MP1 P1.MP2 P2.1 SW1.1 SW1.2 U1.1 U1.3 U2.2 U2.3 U3.3 | length 210.6
  Top Layer w0.254: J1.6 15.864,81.915 ; U2.3 16.126,82.177 15.864,81.915 ; C13.2 18.552,84.602 C12.2 18.415,84.465 18.415,82.826 18.266,82.677 U2.2 16.118,82.677 15.864,82.423 15.864,81.915 ; C4.2 35.019,40.302 36.4,40.302 ; U1.1 36.719,39.983 36.4,40.302 ; U1.3 37.719,39.983 37.4,40.302 36.4,40.302 ; v2(74.041,59.563) 74.07,59.534 75.435,59.534 J2.6
  Top Layer w0.406: F3.1@71.695,55.512 v1(72.645,55.512) ; F6.1 71.708,60.598 72.62,60.598 v1(72.644,60.575) v1@72.644,60.604 ; F5.1 71.706,63.136 72.631,63.136 v1(72.636,63.14) ; F1.1 v1(72.644,65.649) ; F4.1@71.714,58.052 v1(72.645,58.052) ; F2.1@71.714,68.212 71.719,68.217 72.639,68.217 v1(72.644,68.221)
  Top Layer w0.508: B1.43 B1.42 B1.49 B1.48 B1.47 B1.46 B1.45 B1.44 B1.41
  Top Layer w0.61: v1(11.938,68.183) J1.5 ; J1.6 16.816,78.883 17.669,79.736 C9.2 ; C13.2 18.552,87.146 18.909,87.503 22.376,87.503 22.723,87.85 22.723,88.509 22.743,88.529 22.743,90.053 23.978,91.288 SW1.1 ; B3.3 27.136,50.07 C11.2@27.622,49.584 ; J1.4 27.638,70.533 v1(27.686,70.485) ; SW1.2 SW1.1 ; C11.2 v1(29.337,49.647) ; v1@30.733,40.385 C3.2 34.406,40.385 C4.2 ; C6.1 33.122,88.228 32.253,88.228 31.369,89.112 31.369,91.547 32.639,92.817 ; C2.2@33.401,91.43 34.788,92.817 ; C1.2 36.338,91.695 37.46,92.817 ; C5.1@48.025,50.538 48.025,50.824 C5.1@48.181,50.98 ; C10.2@51.011,44.29 C10.2 ; v1@58.523,50.538 v1(58.531,50.53) ; v1(71.374,90.424) 68.981,92.817 B1.40 B1.1 37.46,92.817 ; v1(72.644,68.221) 72.644,70.358 73.152,70.866 C7.2 77.216,66.793 76.978,66.555 J2.11 ; v1(75.438,40.356) C14.2 ; J2.12 J2.12@79.805,55.364 ; J4.6 v1(86.995,52.578) ; 90.521,70.866 90.878,70.509 ; SW1.1 25.654,91.293 25.654,92.456 26.015,92.817 32.639,92.817 ; 32.639,92.817 34.788,92.817 ; 34.788,92.817 37.46,92.817
  Top Layer w1.27: v1(13.081,24.257) 14.575,22.763 17.252,22.763 BT1.N ; J1.5 J1.6 ; v1(42.083,60.025) P1.MP2 ; v1(56.642,60.071) 58.485,60.071 P1.MP1
  Bottom Layer w0.254: 72.644,59.436 72.771,59.563 v2(74.041,59.563)
  Bottom Layer w0.61: v1(72.636,63.14) v1@72.644,63.131 ; v1(72.645,55.512) v1(72.645,58.052) 72.644,59.436 v1(72.644,60.575) v1@72.644,63.131 ; v1(72.644,68.221) v1(72.644,65.649) v1@72.644,63.132 ; J4.5 J4.6
  Bottom Layer w1.27: v1(81.28,39.624) 84.836,39.624 86.995,41.783 J4.5
  other v1: 33.782,10.541 50.419,10.541 69.215,10.541 37.338,19.939 65.532,19.939 51.943,29.21 89.535,31.242 13.081,32.004 89.281,36.957 57.531,38.481 30.618,40.385 68.453,40.64 51.308,42.799 95.123,45.466 3.683,51.181 29.464,55.372 94.996,59.944 45.593,77.577 57.023,77.577 51.308,77.597 45.593,84.455 57.023,84.455 53.467,85.097 45.593,91.537 51.308,91.567 57.023,91.567
GP0: B1.27 R16.2 | length 32.8
  Top Layer w0.305: B1.27@60.047,76.307 B1.27 v1(62.779,76.307) ; v1(68.453,76.327) 68.453,83.963 68.818,84.328 83.693,84.328 R16.2
  Bottom Layer w0.305: v1(62.779,76.307) 62.789,76.317 68.443,76.317 v1(68.453,76.327)
LCD_RX: B1.19 P1.3 | length 35.9
  Top Layer w0.305: B1.19@49.382,75.047 49.382,71.734 48.768,71.12 43.053,71.12 42.52,70.587 42.52,62.763 43.053,62.23 51.562,62.23 52.181,61.611 P1.3
LCD_TX: B1.18 P1.4 | length 35.3
  Top Layer w0.305: B1.18@48.112,75.047 48.112,72.242 47.549,71.679 42.596,71.679 41.961,71.044 41.961,62.932 41.021,61.992 41.021,57.388 41.259,57.15 49.657,57.15 50.181,56.626 P1.4
NetB2_1: B2.1 X1.2 | length 3.9
  Top Layer w0.406: X1.2@52.344,38.227 52.344,40.767 52.553,40.976 B2.1
NetB2_2: B2.2 X1.1 | length 2.8
  Top Layer w0.406: X1.1@54.844,38.227 54.864,38.247 B2.2
NetB2_3: B2.3 BT1.P | length 40.7
  Top Layer w0.406: BT1.P 37.592,22.479 38.227,23.114 v1(38.227,24.892) ; v1(45.085,28.575) 45.085,33.671 45.323,33.909 v1(56.134,33.909) B2.3
  Bottom Layer w0.406: v1(38.227,24.892) 38.227,28.353 38.449,28.575 v1(45.085,28.575)
NetC13_1: C13.1 U2.5 | length 4.3
  Top Layer w0.254: U2.5 19.788,82.679 19.421,82.679 19.185,82.915 19.185,83.58 19.827,84.223 19.827,86.208 C13.1
NetJ3_1: J3.1 R18.1 | length 2.6
  Top Layer w0.406: J3.1 37.211,78.105 37.338,77.978 R18.1 R18.1@38.239,78.078
NetJ3_2: J3.2 R19.1 | length 2.6
  Top Layer w0.406: J3.2 36.033,75.784 37.176,75.784 37.338,75.946 R19.1
NetQ1_1: Q1.1 R14.1 | length 6.4
  Top Layer w0.305: Q1.1 72.501,78.681 72.136,79.046 72.136,82.566 72.501,82.931 R14.1
NetQ1_2: Q1.2 R15.2 | length 2.2
  Top Layer w0.305: R15.2 75.045,76.681 75.245,76.881 Q1.2
NetQ2_1: Q2.1 R16.1 | length 6.8
  Top Layer w0.305: Q2.1 80.958,78.681 80.518,79.121 80.518,82.423 81.026,82.931 R16.1
NetQ2_2: Q2.2 R17.2 | length 2.2
  Top Layer w0.305: R17.2 83.681,76.681 83.881,76.881 Q2.2
NetR20_1: R20.1 U3.4 | length 7
  Top Layer w0.305: R20.1 84.709,36.449 84.963,36.195 U3.4
PWMA: B1.20 J7.5 | length 66.9
  Top Layer w0.305: B1.20@50.652,75.047 50.652,71.649 51.181,71.12 59.69,71.12 60.198,70.612 60.198,26.162 59.69,25.654 53.705,25.654 53.213,25.162 J7.5
PWMAL: B1.21 J7.3 | length 64.1
  Top Layer w0.305: B1.21@51.922,75.047 51.922,72.319 52.562,71.679 60.147,71.679 60.782,71.044 60.782,25.476 60.325,25.019 56.256,25.019 55.897,24.661 55.897,23.639 J7.3@55.755,23.497
PWMB: B1.22 J7.1 | length 61.8
  Top Layer w0.305: B1.22@53.192,75.047 53.192,72.792 53.746,72.238 60.731,72.238 61.341,71.628 61.341,24.003 60.833,23.495 J7.1
PWMBL: B1.23 J7.2 | length 64.3
  Top Layer w0.305: B1.23@54.462,75.047 54.462,73.3 54.966,72.796 61.316,72.796 61.976,72.136 61.976,21.463 61.468,20.955 J7.2
PWMC: B1.24 J7.4 | length 69.5
  Top Layer w0.305: B1.24@55.732,75.047 55.732,73.935 56.312,73.355 61.9,73.355 62.484,72.771 62.484,19.939 61.976,19.431 56.08,19.431 55.735,19.776 55.735,20.937 J7.4
PWMCL: B1.25 J7.6 | length 73
  Top Layer w0.305: J7.6 53.213,19.304 53.721,18.796 62.484,18.796 63.017,19.329 63.017,73.295 62.398,73.914 57.404,73.914 57.023,74.295 B1.25@57.023,75.026
PWMF: B1.12 J7.9 | length 75.9
  Top Layer w0.305: B1.12@42.537,78.837 40.924,78.837 39.878,79.883 34.685,79.883 34.138,79.336 34.138,71.78 34.544,71.374 35.636,71.374 36.297,70.713 36.297,66.063 36.726,65.634 39.534,65.634 39.853,65.315 39.853,56.042 40.091,55.804 41.735,55.804 42.215,55.324 42.215,40.97 43.307,39.878 43.307,25.13 43.545,24.892 46.919,24.892 48.133,23.678 J7.9
PWMH: B1.10 J7.10 | length 85.8
  Top Layer w0.305: B1.10 40.867,81.387 40.506,81.026 33.655,81.026 33.02,80.391 33.02,70.485 33.477,70.028 34.66,70.028 35.179,69.509 35.179,64.989 35.652,64.516 38.497,64.516 38.735,64.278 38.735,54.848 38.973,54.61 40.783,54.61 41.021,54.372 41.021,38.862 41.402,38.481 42.434,38.481 42.672,38.243 42.672,26.884 42.164,26.376 42.164,19.669 42.402,19.431 46.99,19.431 48.133,20.574 J7.10
RDY: B1.7 U1.2 | length 74.9
  Top Layer w0.254: U1.2 37.219,37.6 36.957,37.338 29.718,37.338 29.464,37.592 29.464,43.307 29.718,43.561 33.655,43.561 34.036,43.942 34.036,49.911 34.671,50.546 34.671,56.134 34.29,56.515 31.623,56.515 31.242,56.896 31.242,82.296 31.745,82.799 38.984,82.799 39.421,83.236 39.421,84.76 39.858,85.197 B1.7
RXi: B1.37 P2.4 | length 38.1
  Top Layer w0.305: B1.37@60.037,88.997 60.086,88.948 67.262,88.948 67.564,88.646 67.564,72.628 67.802,72.39 74.565,72.39 74.803,72.628 74.803,74.756 75.041,74.994 78.168,74.994 78.41,74.752 78.41,73.931 P2.4
SCL1: B1.8 B2.6 B3.1 R6.2 U1.10 | length 100.1
  Top Layer w0.254: B3.1 33.116,46.07 33.401,46.355 33.401,50.8 v1(33.655,51.054) ; R6.2@35.806,48.867 36.427,48.867 36.719,48.575 U1.10@36.719,43.354 ; v1(44.069,48.133) 55.985,48.133 56.134,47.984 B2.6
  Top Layer w0.305: R6.2 v1(35.56,51.054) 35.56,56.769 35.179,57.15 32.258,57.15 31.852,57.556 31.852,81.763 32.258,82.169 39.592,82.169 40.005,82.582 40.005,83.435 40.497,83.927 B1.8
  Bottom Layer w0.254: v1(33.655,51.054) 39.856,51.054 40.005,50.905 40.005,49.53 40.399,49.136 43.063,49.136 43.212,48.987 43.212,48.282 43.361,48.133 v1(44.069,48.133)
SCL2: B1.6 J1.3 R1.2 U2.6 | length 49.2
  Top Layer w0.254: U2.6 19.936,83.177 19.938,83.179 28.203,83.179 28.724,82.658 28.724,77.194 28.944,76.974 R1.2 ; J1.3 29.099,72.533 29.591,73.025 R1.2 ; B1.6 39.35,86.467 38.862,85.979 38.862,83.82 38.4,83.358 31.04,83.358 30.607,82.925 30.607,77.216 30.365,76.974 R1.2
SDA1: B1.9 B2.5 B3.4 R7.2 U1.9 | length 97.7
  Top Layer w0.254: B3.4 v1(33.655,52.07) ; U1.9@37.203,43.219 37.203,48.633 37.437,48.867 R7.2@37.965,48.867 ; v1(44.069,49.657) 44.069,49.044 44.218,48.895 57.255,48.895 57.404,48.746 B2.5
  Top Layer w0.305: R7.2 v1@38.219,51.747 ; v1@38.219,52.001 v1(38.219,52.07) 38.176,52.113 38.176,57.344 37.735,57.785 32.766,57.785 32.41,58.141 32.41,81.051 32.944,81.585 39.846,81.585 40.918,82.657 B1.9
  Bottom Layer w0.254: v1(33.655,52.07) v1(38.219,52.07) 40.343,52.07 40.545,51.868 40.545,49.831 40.694,49.682 44.044,49.682 v1(44.069,49.657)
SDA2: B1.5 J1.2 R2.2 U2.4 | length 41.6
  Top Layer w0.254: U2.4 19.792,82.175 27.045,82.175 v1(27.051,82.169) 27.057,82.175 27.674,82.175 28.067,81.782 28.067,77.194 27.847,76.974 R2.2 27.051,74.93 26.654,74.533 J1.2 ; v1(33.401,84.146) 37.791,84.146 38.227,84.582 38.227,87.102 38.852,87.727 B1.5@42.537,87.727
  Bottom Layer w0.254: v1(27.051,82.169) 29.563,82.169 29.978,82.584 29.978,83.445 30.607,84.074 33.329,84.074 v1(33.401,84.146)
SENT: J7.12 U1.4 | length 27.9
  Top Layer w0.254: U1.4 38.219,34.693 38.07,34.544 36.598,34.544 36.449,34.395 36.449,26.289 36.83,25.908 38.498,25.908 39.064,25.342 39.064,21.388 39.497,20.955 v1(40.132,20.955)
  Bottom Layer w0.254: v1(40.132,20.955) J7.12
SENV: J7.11 U1.5 | length 25.2
  Top Layer w0.254: U1.5 38.719,34.192 38.519,33.992 37.131,33.992 36.982,33.844 36.982,26.899 37.405,26.476 39.832,26.476 40.132,26.176 v1(40.132,23.495)
  Bottom Layer w0.254: v1(40.132,23.495) J7.11
TE1: B1.28 J5.2 R4.2 | length 105.5
  Top Layer w0.305: J5.2 42.406,11.085 R4.2 42.406,17.133 42.977,17.704 63.17,17.704 63.576,18.11 63.576,53.991 63.916,54.331 v1(70.842,54.331) ; B1.28 v1(62.779,77.577)
  Bottom Layer w0.305: v1(62.779,77.577) 62.799,77.597 70.739,77.597 71.12,77.216 71.12,65.886 70.842,65.608 v1(70.842,54.331)
TE2: B1.29 J6.2 R5.2 | length 92.8
  Top Layer w0.305: J6.2 58.039,11.073 58.039,14.466 58.027,14.478 58.027,16.625 58.547,17.145 63.627,17.145 64.135,17.653 64.135,53.415 64.314,53.594 v1(71.844,53.594) ; B1.29 v1(62.779,78.847)
  Bottom Layer w0.305: v1(62.779,78.847) 62.799,78.867 71.374,78.867 71.844,78.397 v1(71.844,53.594)
TXo: B1.36 P2.5 | length 33.5
  Top Layer w0.305: B1.36@60.037,87.727 66.578,87.727 66.929,87.376 66.929,72.009 67.183,71.755 75.776,71.755 76.014,71.993 P2.5
pads on no net: B1.4 B1.15 B1.16 B1.26 B1.38 B1.39 B2.7 B3.5 B3.6 B3.MH1 B3.MH2 B3.MH3 B3.MH4 B3.MS1 B3.MS2 BT1. J2.9 J2.10 P1.1 P1.2 P2.3 U1.7 U3.1 U3.5 U3.6 U3.7 U3.8

## Polygon pours and split planes (outlines as drawn)
GND on Bottom Layer "NONET_L02_P000" (solid, remove dead copper, shelved, pour order 0): 25.845,94.04 ccw(c50.165,50.165) 74.485,94.04
GND on Top Layer "NONET_L01_P001" (solid, remove dead copper, shelved, pour order 1): 25.845,94.04 ccw(c50.165,50.165) 74.485,94.04

## Silkscreen, mask and mechanical layers (free items; w line width, h text height)
Top Overlay:
  text "R" at 27.559,62.23 h10.16
  text "C" at 26.797,60.071 h6.35
  text "F" at 33.147,59.055 h6.35
  text "P" at 26.924,52.959 h6.35
  text "W" at 33.655,52.959 h6.35
  text "CPAP" at 70.662,44.196 h1.78 r90
  text "E" at 27.686,6.604 h10.16
  text "H" at 66.04,6.223 h10.16
Bottom Overlay:
  lines w0.254: 44.069,11.684 60.071,11.684 ; 46.736,5.588 46.736,17.78 ; 49.276,5.588 49.276,17.804 ; 51.816,5.588 51.816,17.78 ; 54.483,5.588 54.483,17.78 ; 57.15,5.588 57.15,17.78 ; 79.636,53.833 89.24,53.833 ; 83.457,50.056 83.457,57.515 ; 85.852,50.038 85.852,57.495 ; 79.756,50.038 89.255,50.038 89.255,57.508 79.636,57.508 79.636,50.158 79.696,50.098 79.756,50.038 ; 79.756,50.038 79.756,50.038 ; 44.069,5.588 60.071,5.588 60.071,17.78 44.069,17.78 44.069,5.588
  text "3V3" at 81.661,54.494 h0.81 r270
  text "5V0" at 84.157,54.483 h0.81 r270
  text "GND" at 86.741,54.356 h0.81 r270
  text "3V0" at 84.157,50.927 h0.81 r270
  text "GND" at 86.741,50.871 h0.81 r270
  text "3V3" at 81.661,50.8 h0.81 r270
  text "PWMB" at 58.047,13.208 h0.81 r270
  text "PWMA" at 52.832,13.081 h0.81 r270
  text "SENV" at 45.085,12.827 h0.81 r270
  text "PWMF" at 47.684,12.827 h0.81 r270
  text "PWMAL" at 55.429,12.7 h0.81 r270
  text "DVROFF" at 50.165,12.337 h0.81 r270
  text "PWMH" at 47.625,7.366 h0.81 r270
  text "PWMC" at 55.499,7.366 h0.81 r270
  text "SENT" at 45.085,7.257 h0.81 r270
  text "PWMCL" at 52.832,7.112 h0.81 r270
  text "FAULT" at 50.165,6.985 h0.81 r270
  text "PWMBL" at 58.293,6.927 h0.81 r270
Mechanical 1:
  pour cut-out: 39.421,67.04 cw(c39.421,68.79) 37.671,68.79 cw(c39.421,68.79) 39.421,70.54 cw(c39.421,68.79) 41.171,68.79 cw(c39.421,68.79)
  lines w0.102: 25.845,94.04 ccw(c50.165,50.165) 74.485,94.04 25.845,94.04 ; 43.191,64.052 ccw(c44.191,64.052) 44.191,63.052 58.191,63.052 ccw(c58.191,64.052) 59.191,64.052 59.191,69.052 ccw(c58.191,69.052) 58.191,70.052 44.191,70.052 ccw(c44.191,69.052) 43.191,69.052 43.191,64.052